# Altium PCB txrx.PcbDoc
Units mil, origin at the board's own origin, x right, y up, seen from the top; angles counter-clockwise.
Board outline 1966 x 1635 mil, 2 copper layers (Top Layer, Bottom Layer); 16 components, 24 nets, 74 pads, 16 vias.
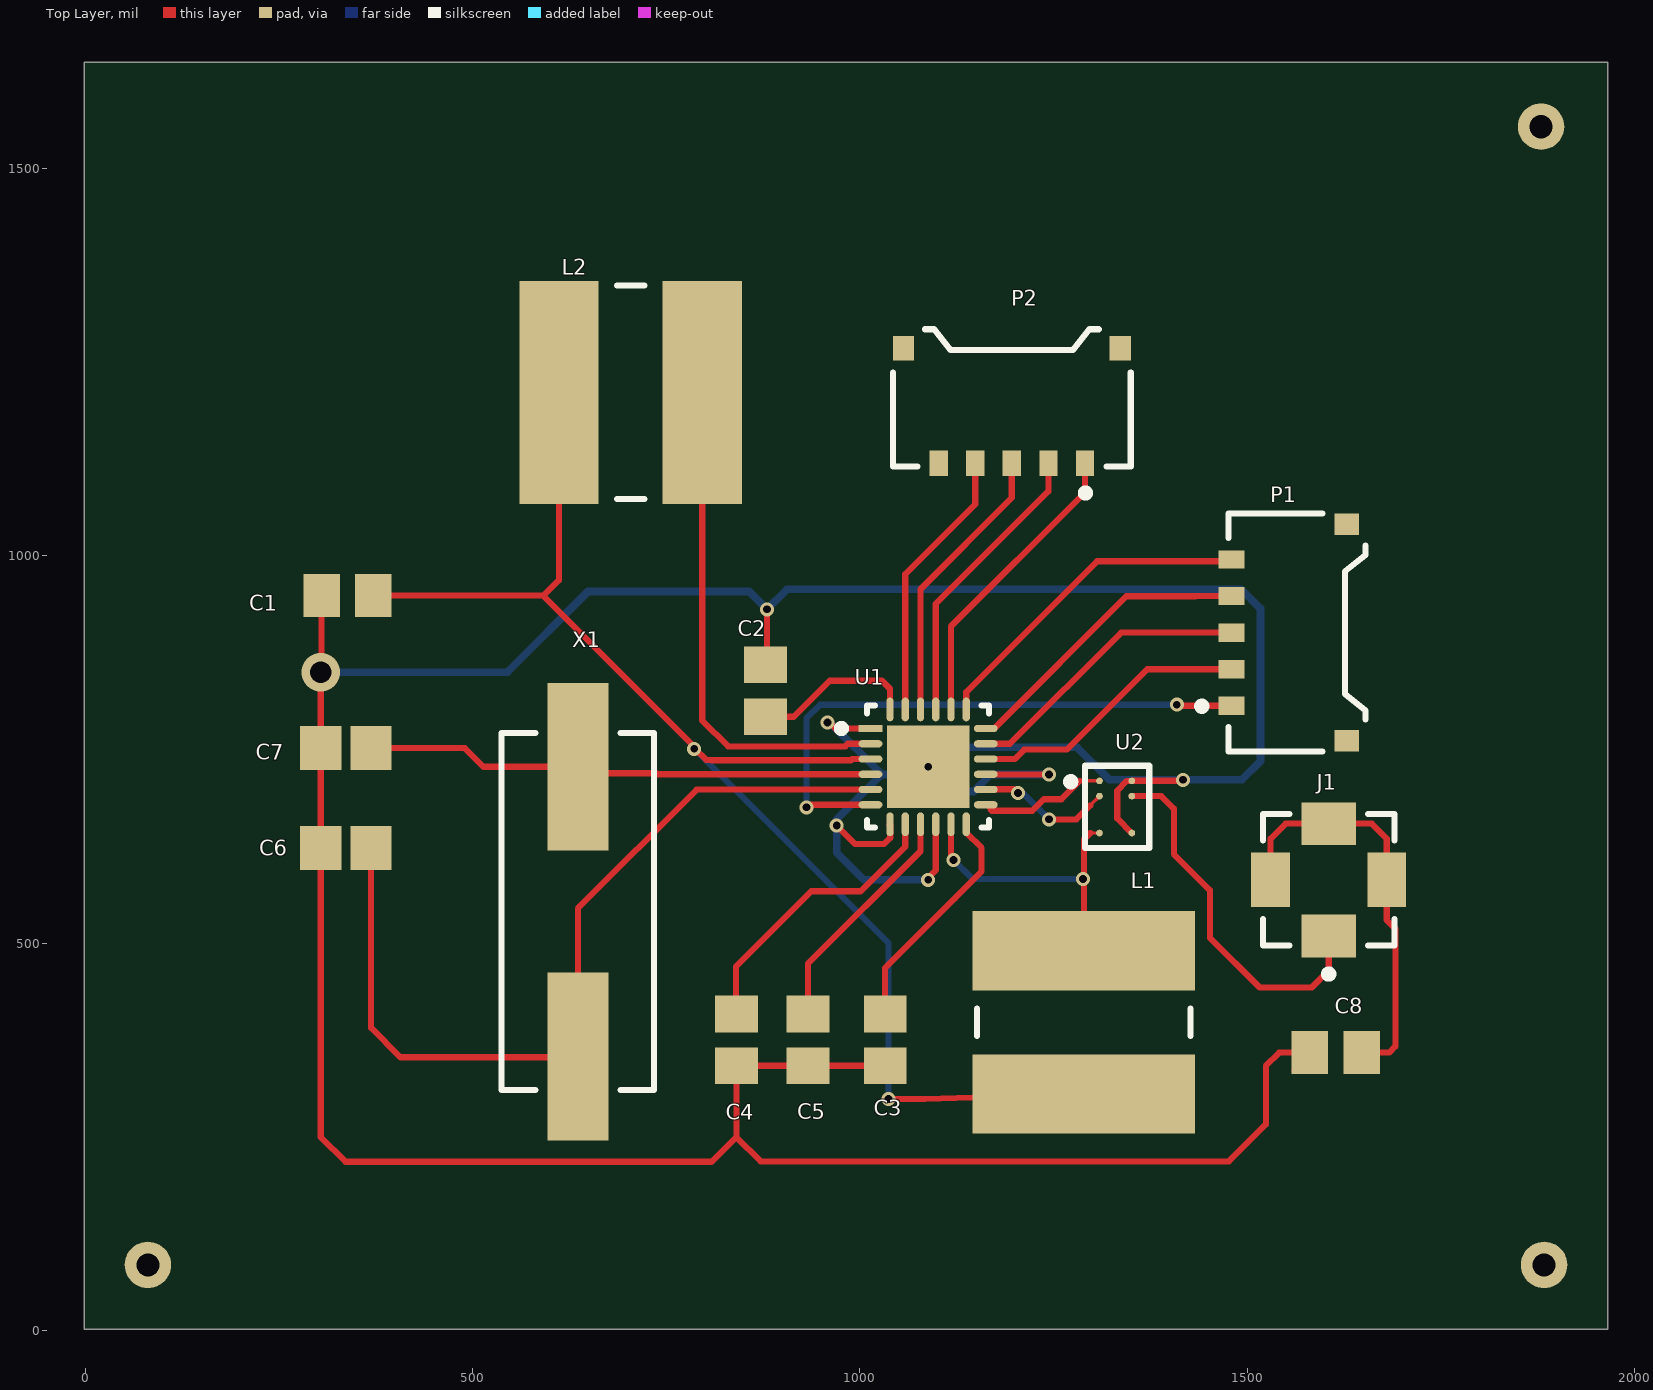
[diagram p0: Top Layer view]
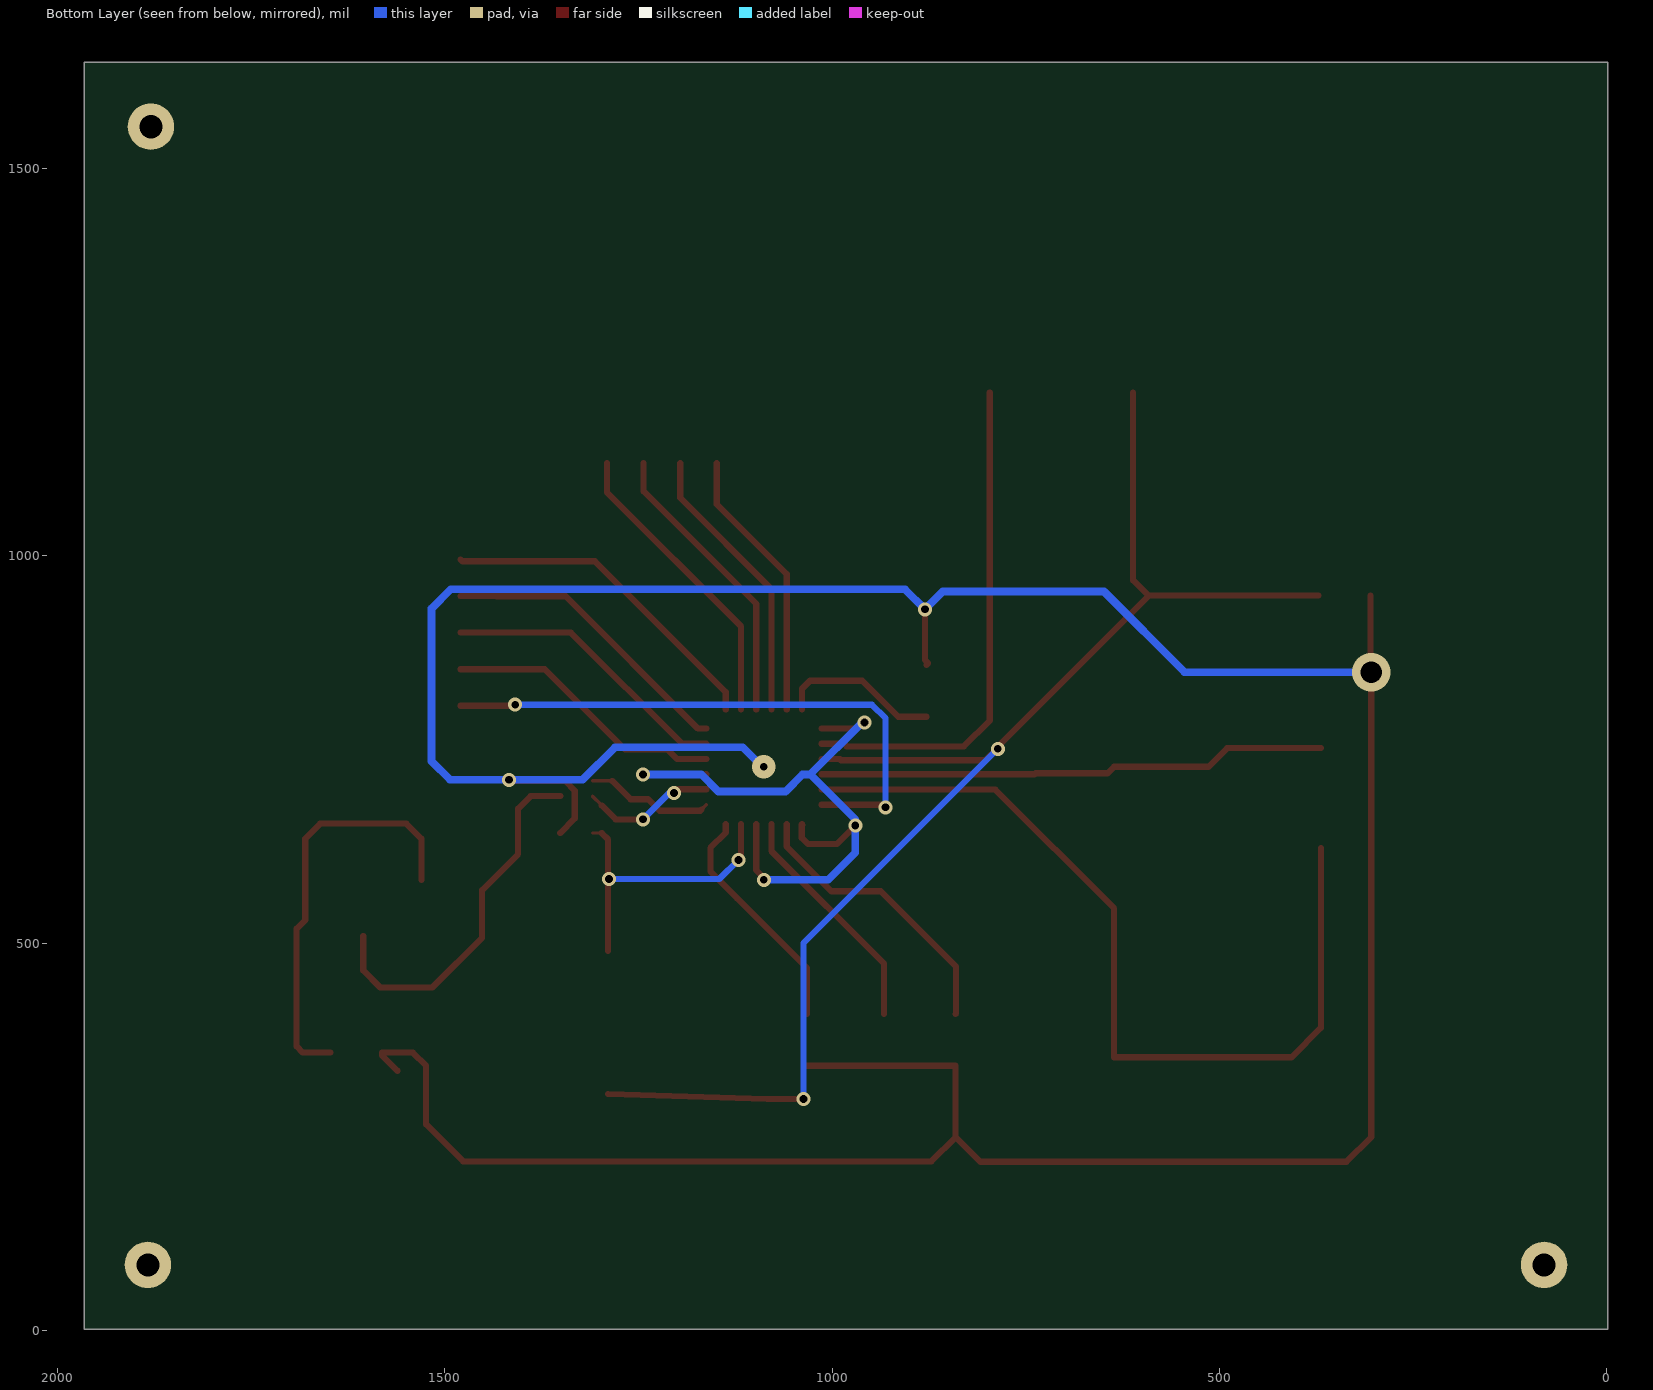
[diagram p1: Bottom Layer view, seen from below]

## Layer stack, top to bottom
Top Solder: solder mask 0.4, Solder Resist, Dk 3.5
Top Layer: signal copper 1.4
Dielectric 1: dielectric 12.6, FR-4, Dk 4.8
Bottom Layer: signal copper 1.4
Bottom Solder: solder mask 0.4, Solder Resist, Dk 3.5

## Board outline
-1,2 1965,2 1965,1637 -1,1637

## Design rules (kind name [scope] priority, off if disabled: settings)
Clearance [All] p1: gap=10 ignorepadtopadclearanceinfootprint=FALSE except(0: Arc-Hole Track-Hole SMDPad-Hole THPad-Hole Via-Hole Fill-Hole Poly-Hole Region-Hole Text-Hole)
PolygonConnect [All] p1: connectstyle=Relief reliefconductorwidth=10 reliefentries=4 polygonreliefangle="90 Angle" airgapwidth=10
RoutingVias [All] p1: holewidth=10 width=18 viastyle="Through Hole" minholewidth=10 minwidth=15 maxholewidth=12 maxwidth=20
SMDNeckDown [All] p1: percent=50.000
SolderMaskExpansion [All] p1: expansion=4 istentingtop=FALSE
Width [All] p1: maxlimit=10 minlimit=5 preferedwidth=8
30 further rules are at their usual default settings.

## Classes and differential pairs
component class txrx: C1 C2 C3 C4 C5 C6 C7 C8 J1 L1 L2 P2 U1 U2 X1

## Components (designator, comment, footprint, x,y, rotation, side; value= is the part's Value field where it differs from the comment)
C1 "0.033uF" CAPC2013X95X45NL10T25 338.63,949.02 r0 top
C2 "0.033uF" CAPC2013X95X45NL10T25 878,826 r270 top
C3 "0.033uF" CAPC2013X95X45NL10T25 1032.48,375.35 r90 top
C4 "0.033uF" CAPC2013X95X45NL10T25 840.55,375.35 r90 top
C5 "0.033uF" CAPC2013X95X45NL10T25 933.07,375.35 r270 top
C6 "20pF" CAPC2013X94X50NL20T25 336.66,623 r180 top
C7 "20pF" CAPC2013X94X50NL20T25 336.66,752 r180 top
C8 "0.033uF" CAPC2013X95X45NL10T25 1614,359 r0 top
J1 "908-22101" AMPH-908-22101_V 1605,582 r0 top
L1 "1mH" WE-TPC-6823-X 1289,398 r270 top
L2 "744062152" WE-TPC-6823-X 704,1211 r0 top
P1 "78171-0005" MOLX-78171-0005_V 1564,901 r90 top
P2 "78171-0005" MOLX-78171-0005_V 1196,1204 r180 top
U1 "S2-LPQTR" FP-QFN24L-IPC_C 1088,728 r0 top
U2 "BALF-SPI2-01D3" FP-Flip-Chip6-MFG 1332,676 r270 top
X1 "FOXSDLF/160-20" FOX-FOXSDLF160-20_V 636,541 r270 top

## Footprints (in the part's own frame and the unit in brackets; to place one, negate y for a bottom-side part, rotate by r counter-clockwise, add the part's x,y. Pads: shape width x height; smd on the part's side, far side on the other; paste and mask are expansions set on the pad)
AMPH-908-22101_V [mil] "Connector, 4-Leads, Body 4.318x4.318mm"
  rect 70x55 smd paste-39.37: 1(0,-72.5) 3(0,72.5)
  rect 50x70 smd paste-39.37: 2(75,0) 4(-75,0)
  silkscreen extent -85,-127 85,85, body extent -85,-85 85,85, height 143
CAPC2013X94X50NL20T25 [mm] "Chip Capacitor, 2-Leads, Body 2.01x1.25mm, IPC Medium Density"
  rect 1.35x1.45 smd: 1(-0.825,0) 2(0.825,0)
  body extent -1.1,-0.72 1.11,0.72, height 0.94
CAPC2013X95X45NL10T25 [mm] "Chip Capacitor, 2-Leads, Body 2.00x1.25mm, IPC Medium Density"
  rect 1.2x1.4 smd: 1(-0.85,0) 2(0.85,0)
  body extent -1.05,-0.67 1.05,0.67, height 0.95
FOX-FOXSDLF160-20_V [mm] "SMD, 2-Leads, Body 5x11.7mm, Height 4.5mm"
  rect 5.5x2 smd: 1(-4.75,0) 2(4.75,0)
  silkscreen extent -5.85,-2.5 5.85,2.5, body extent -5.85,-2.5 5.85,2.5, height 4.5
FP-Flip-Chip6-MFG [mm]
  round 0.22 smd paste-1000 mask-1000: A1(-0.855,-0.58) A2(-0.855,0.48) B1(-0.355,-0.58) B2(-0.355,0.48) D1(0.855,-0.58) D2(0.855,0.48)
  silkscreen extent -1.35,-1.65 1.35,1.05, body extent -1.58,-1.3 1.58,1.3, height 0.25
FP-QFN24L-IPC_C [mm]
  rect 0.779x0.239 smd paste+0 mask+0: 1(-1.89,1.25)
  rrect100% 0.779x0.239 smd paste+0 mask+0: 2(-1.89,0.75) 3(-1.89,0.25) 4(-1.89,-0.25) 5(-1.89,-0.75) 6(-1.89,-1.25) 13(1.89,-1.25) 14(1.89,-0.75) 15(1.89,-0.25) 16(1.89,0.25) 17(1.89,0.75) 18(1.89,1.25)
  rrect100% 0.239x0.779 smd paste+0 mask+0: 7(-1.25,-1.89) 8(-0.75,-1.89) 9(-0.25,-1.89) 10(0.25,-1.89) 11(0.75,-1.89) 12(1.25,-1.89) 19(1.25,1.875) 20(0.75,1.875) 21(0.25,1.875) 22(-0.25,1.875) 23(-0.75,1.875) 24(-1.25,1.875)
  rect 2.7x2.7 smd paste-1000 mask+0: 25(0,0)
  silkscreen extent -2.97,-2 2,2, body extent -2.38,-2.38 2.38,2.38, height 0.25
MOLX-78171-0005_V [mm] "Hand Drawn,5-Leads, Body 7.8x4.5mm,Pitch 1.2mm"
  rect 0.6x0.85 smd: 1(-2.4,2.145) 2(-1.2,2.145) 3(0,2.145) 4(1.2,2.145) 5(2.4,2.145)
  rect 0.7x0.8 smd: MP1(-3.55,-1.63) MP2(3.55,-1.63)
  silkscreen extent -3.9,-2.25 3.9,3.24, body extent -3.9,-2.25 3.9,2.28, height 1.41
WE-TPC-6823-X [mm] "SMD Inductor, 2-Leads, Body 6.8 x 6.8 mm"
  rect 2.6x7.3 smd: 1(-2.35,0) 2(2.35,0)
  silkscreen extent -0.45,-3.5 0.45,3.5, body extent -3.4,-3.4 3.4,3.4, height 2.29

## Part data
C1 C2 C3 C4 C5 C8: library part CMP-1036-04169-2, Manufacturer=Murata, Part Number=GRM219R71H333KA01D
C6 C7: library part CMP-2007-04294-1, Manufacturer="AVX Interconnect / Elco", Part Number=08055A200JAT2A
J1: library part CMP-2000-05707-1, "Female MMCX Connector, 1 Position, Height 3.607 mm, -40 to 90 degC, RoHS, Bulk", Dielectric Material=LiquidCrystalPolymer(LCP), Frequency - Max=6GHz, Housing Color=Black, Manufacturer=Amphenol, Operating Temperature=-55°C~155°C, Package Description="Female MMCX Connector, 1 Position, Height 3.607 mm", Standard Package=1, Voltage Rating=-, 3D Model=908-22101.igs, Body Finish=Gold, Body Material=BerylliumCopper, Cable Group=-, Category=Connectors,Interconnects, Center Contact Material=BerylliumCopper, Center Contact Plating=Gold, Connector Style=MMCX, Connector Type=Jack,FemaleSocket, Contact Termination=Solder, Datasheet URL=http://www.amphenolrf.com/downloads/dl/file/id/2664/product/2399/908_22101_customer_drawing.pdf, Datasheet Version="Rev. A, 05/1997", Family=CoaxialConnectors(RF), Fastening Type=Snap-On, Features=-, Impedance=50Ohm, Ingress Protection=-, Manufacturer URL=http://www.amphenol.com/, Mounting Technology=SurfaceMount, Mounting Type=SurfaceMount, Online Catalog=MMCX,MicroMate™Series, Other Names=90822101ARF1724, Package Reference=908-22101, Packaging=Bulk, Series=MicroMate™, Shield Termination=Solder
L1 L2: library part CMP-0227-00385-1, "SMD Shielded Tiny Power Inductor WE-TPC, L = 1500 µH", Inductance="1500 ÂµH", ComponentLink1Description="Manufacturer Link", ComponentLink1URL=http://www.we-online.com, ComponentLink2Description=Datasheet, ComponentLink2URL=http://www.we-online.de/katalog/media/pdf/744062152.pdf, DatasheetVersion="ver 5, Jan-2009", PackageDescription="SMD Inductor, 2-Leads, Body 6.8 x 6.8 mm", PackageReference=WE-TPC-6823-X, PackageVersion=2009
P1 P2: library part CMP-0538-00001-4, "Pico-EZmate 1.20 mm Pitch Wire-to-Board Header, Vertical, Housing Height:1.55 mm, with side-Friction Locks, 5 Circuits, 1.5 A, -25 to 85 degC, Tape and Reel", Color - Resin=Black, Current - Maximum per Contact="1.5 A", Manufacturer=Molex, Operating Temperature Range="-25 to 85 degC", Voltage - Maximum="50 V AC/DC", Circuits (Loaded)=5, Circuits (maximum)=5, ComponentLink1Description="Manufacturer URL", ComponentLink1URL=http://www.molex.com/, ComponentLink2Description=Datasheet, ComponentLink2URL=http://www.molex.com/webdocs/datasheets/pdf/en-us/0781710005_PCB_HEADERS.pdf, ComponentLink3Description="Package Specification", ComponentLink3URL=http://www.molex.com/pdm_docs/sd/781710005_sd.pdf, Material - Plating Mating=Gold, Material - Plating Termination=Gold, Mounting Technology="Surface Mount", Number of Rows=1, PackageDescription="5-Pin Surface Mount Device,  W-T-B plug connector, 7.8 x 4.5 mm", PackageReference=78171-0005, PackageVersion="Rev. D", Packing="Embossed Tape and Reel", PartNumber=78171-0005
U1: library part CMP-12160-000011-1, "IC RF TXRX ISM<1GHZ 24VFQFN", Ambient Temperature Range High=+105°C, Ambient Temperature Range Low=-40°C, Manufacturer=STMicroelectronics, Max Frequency=958MHz, Max Supply Voltage=3.6V, Min Supply Voltage=1.8V, Package=QFN24L, Temperature="-40°C to +105°C", Automotive=No, Bandwidth=1-800kHz, Category=IC, ComponentLink2Description=Datasheet, ComponentLink2URL=https://www.st.com/resource/en/datasheet/s2-lp.pdf, Data Rate=500kbits/s, Device Class L1="Integrated Circuits (ICs)", Device Class L2="RF Semiconductors and Devices", Device Class L3=Transceivers, Digikey Description="IC RF TXRX ISM<1GHZ 24VFQFN", Height=1mm, Interface=SPI,UART, Ipc Land Pattern Name=QFN50P400X400X90-24, Lead Free=Yes, Manufacturer Part Number=S2-LPQTR, Number Of Gpio=4, Octopart=https://octopart.com/s2-lpqtr-stmicroelectronics-76714564, RoHS=TRUE, Sensitivity=-130dBm, Standoff Height=0.02mm, Temperature Range High=+105°C, Temperature Range Low=-40°C
U2: library part CMP-12156-000001-1, "BALUN 868MHZ-928MHZ 50/50 6UFBGA", Manufacturer=STMicroelectronics, Max Frequency=930MHz, Package=Flip-Chip6, Temperature="-40°C to +105°C", Temperature Range High=+105°C, Temperature Range Low=-40°C, Automotive=No, Bandwidth=860-930MHz, Category=IC, ComponentLink2Description=Datasheet, ComponentLink2URL=https://www.st.com/resource/en/datasheet/balf-spi2-01d3.pdf, Device Class L1="Integrated Circuits (ICs)", Device Class L2="RF Semiconductors and Devices", Device Class L3=unset, Digikey Description="BALUN 868MHZ-928MHZ 50/50 6UFBGA", Height=0.68mm, Lead Free=Yes, Manufacturer Part Number=BALF-SPI2-01D3, Mouser Description="BALF-SPI2 Series 927 MHz 21 dB 50 Ohm SMT Balun Transformer - FLIP CHIP-6", Octopart=https://octopart.com/balf-spi2-01d3-stmicroelectronics-84422982, RoHS=TRUE, Standoff Height=0.18mm
X1: library part CMP-1749-00001-1, "Resistance Weld SMD Crystal, 16 MHz, +/- 30 ppm, 20 pF, -20 to 70 degC, 2-Pin SMD, RoHS, Tape and Reel", Case\Package=SOT-553-6, Max Operating Temperature="150 degC", Max Supply Voltage="3.3 V", Max Supply Voltage (DC)="6 V", Min Operating Temperature="-55 degC", Min Supply Voltage="1.4 V", Min Supply Voltage (DC)="4 V", Output Current="3 mA", Package Quantity=1, ComponentLink1Description="Manufacturer URL", ComponentLink1URL=http://www.foxonline.com/, ComponentLink2Description=Datasheet, ComponentLink2URL=http://foxonline.com/pdfs/hc49sdlf.pdf, DatasheetVersion=Mar-15, Height="0.55 mm", Interface=I2C, Length="1.6 mm", Mount="Surface Mount", PackageDescription="2-Pin Surface Mount Device, Body 5 x 11.7 mm, Height 4.5 mm", PackageReference=FOX-FOXSDLF160-20, Packaging="Cut Tape", Pins=6, Radiation Hardening=No, REACH SVHC="No SVHC", RoHSCompliant=true, Weight="9.9E-05 oz", Width="1.2 mm"

## Free pads (board coordinates)
  round 60 hole 30: 5(1879,1554) 6(1883,85) 7(81,85)

## Via types
v1: diameter 18, hole 10, Top Layer to Bottom Layer, 14 vias
v2: diameter 30, hole 10, Top Layer to Bottom Layer, 1 vias
v3: diameter 50, hole 28, Top Layer to Bottom Layer, 1 vias

## Nets (pads, with @x,y where several pads share a name; then routed paths per layer and width w, separated by ;. In a path a pad name is that pad's centre, name@x,y a point inside that pad or via, vN(x,y) a via of type N, cw(c..) or ccw(c..) an arc to the next point about the centre after c; other vN are vias at no path point)
GND: C1.1 C2.1 C3.1 C4.1 C5.2 C6.2 C7.2 C8.1 U1.25 U2.A2 U2.D2 | length 4610.7
  Top Layer w8: C1.1 305.17,850.98 v3(304.18,850) C7.2 C6.2 304.18,250 336.18,218 808.55,218 840.55,250 ; C2.1 876,861.47 880,865.47 v1(880,931) ; C3.1 C5.2 C4.1 840.55,250 ; U2.D2 1332,661.24 1332,697 1344.53,709.53 1350.77,709.53 U2.A2 1351.02,709.79 1415.79,709.79 v1(1417,711) ; C8.1@1560.91,335.44 1580.54,355.06 C8.1 1541,359 1524,342 1524,266.55 1476,218.55 872,218.55 840.55,250
  Bottom Layer w10: v3(304.18,850) 545,850 649,954 857,954 v1(880,931) 906,957 1492,957 1517,932 1517,735 1493,711 v1(1417,711) 1322,711 1280,753 1115.33,753 1090.33,728 v2(1088,728)
NetC1_2: C1.2 L1.2 L2.1 U1.3 | length 1810.8
  Top Layer w8: C1.2 592.02,949.02 ; L2.1 611.48,968.48 592.02,949.02 ; U1.3 990.1,737.84 988.46,736.2 808.82,736.2 808.35,736.67 801.37,736.67 787.04,751 v1(786,751) 786,754 592.02,947.98 592.02,949.02 ; v1(1037,299) 1083.52,299 L1.2
  Bottom Layer w8: v1(786,751) 1037,500 v1(1037,299)
NetC2_2: C2.2 U1.24 | length 211.2
  Top Layer w8: C2.2 914.53,792.53 961,839 1028.47,839 1038.79,828.68 U1.24
NetC3_2: C3.2 U1.12 | length 304.6
  Top Layer w8: C3.2 1032.48,468.27 1122.49,558.28 1157,592.79 1157,623.19 1137.21,642.98 U1.12
NetC4_2: C4.2 U1.8 | length 372.8
  Top Layer w8: C4.2 840,409.37 840,470 937.19,567.19 1000.81,567.19 1058.47,624.86 U1.8
NetC5_1: C5.1 U1.9 | length 304.9
  Top Layer w8: C5.1 933.07,474 1078.16,619.09 U1.9
NetC6_1: C6.1 U1.5 X1.2 | length 1147.9
  Top Layer w8: C6.1 369.14,390.86 407,353 636,353 X1.2 636,545 789.47,698.47 U1.5
NetC7_1: C7.1 U1.4 X1.1 | length 658.5
  Top Layer w8: C7.1 490,752 513.99,728.01 X1.1 644.45,719.56 737.18,719.56 738.58,718.16 U1.4
NetC8_2: C8.2 J1.2 J1.3 J1.4 | length 538.6
  Top Layer w8: J1.4 1530,635 1549.5,654.5 J1.3 1660.5,654.5 1680,635 J1.2 1680,530 1691,519 1691,367 1683,359 C8.2
NetJ1_1: J1.1 U2.B2 | length 480.3
  Top Layer w8: U2.B2 1389.02,689.98 1405.25,673.75 1405.25,615.25 1451.75,568.75 1451.75,507.25 1516,443 1583,443 1605,465 J1.1
NetL1_1: L1.1 U1.11 U2.D1 | length 396.6
  Top Layer w4.33: 1297.34,642.34 U2.D1
  Top Layer w4.71: U1.11 U1.11@1118.43,652.7 ; v1@1118.43,609.88 v1(1120.84,607.47)
  Top Layer w8: U1.11 1117.53,613.49 1120.84,610.18 v1(1120.84,607.47) ; L1.1 1289,634 1297.34,642.34
  Bottom Layer w8: v1(1120.84,607.47) 1145.31,583 v1(1288,583)
NetL2_2: L2.2 U1.2 | length 655.8
  Top Layer w8: L2.2 796.52,787.48 829.8,754.2 981,754.2 984.33,757.53 U1.2
NetP1_1: P1.1 U1.6 | length 755.4
  Top Layer w8: v1(931,675.47) 933.71,675.47 937.02,678.79 U1.6 ; v1(1409,808) 1410.49,806.51 P1.1
  Bottom Layer w8: v1(931,675.47) 931,790.53 948.47,808 v1(1409,808)
NetP1_2: P1.2 U1.16 | length 365.2
  Top Layer w8: U1.16 1199.84,737.84 1212,750 1267,750 1370.76,853.76 P1.2
NetP1_3: P1.3 U1.17 | length 376.6
  Top Layer w8: U1.17 1193.53,757.53 1337,901 P1.3
NetP1_4: P1.4 U1.18 | length 388
  Top Layer w8: U1.18 1173,777.21 1343.79,948 1433,948 1433.12,948.12 1479.43,948.12 P1.4
NetP1_5: P1.5 U1.19 | length 435.7
  Top Layer w8: U1.19 1137.21,824.21 1306,993 1477.06,993 P1.5
NetP2_1: P2.1 U1.20 | length 389.4
  Top Layer w8: U1.20 1117.53,909.04 1290.49,1082 P2.1
NetP2_2: P2.2 U1.21 | length 378
  Top Layer w8: U1.21 1097.84,938 1243.24,1083.4 P2.2
NetP2_3: P2.3 U1.22 | length 366.5
  Top Layer w8: U1.22 1078.16,957.16 1196,1075 P2.3
NetP2_4: P2.4 U1.23 | length 355.1
  Top Layer w8: U1.23 1058.47,976.47 1148.76,1066.76 P2.4
NetU1_13: U1.13 U2.A1 | length 166
  Top Layer w4.33: 1283.66,709.66 U2.A1
  Top Layer w4.71: U1.13 1168.54,672.64
  Top Layer w8: 1168.54,672.64 1170.18,671 1222.47,671 1237.47,686 1260,686 1283.66,709.66
NetU1_14: U1.14 U2.B1 | length 175.4
  Top Layer w4.33: 1297.19,678 U2.B1
  Top Layer w8: U1.14 1162.66,698.74 1199.31,698.74 v1(1204,694) ; v1(1244,660) 1279.19,660 1297.19,678
  Bottom Layer w8: v1(1204,694) 1210,694 v1(1244,660)
VCC: U1.1 U1.7 U1.10 U1.15 | length 893.9
  Top Layer w8: v1(958,785) 960.71,785 968.49,777.21 U1.1 ; v1@970.8,652.8 v1(970,652) 994,628 1031,628 1039,636 1039,653.39 U1.7 1038.79,653.46 U1.7@1038.13,652.8 ; v1(1088,582) 1088,584.71 1097.84,594.55 U1.10 ; U1.15 1162.67,717.89 1236.89,717.89 v1@1237,718
  Bottom Layer w10: v1(958,785) 961,785 1028,718 ; v1(1088,582) 1005,582 970,617 v1(970,652) 970,660 1028,718 ; v1@1237,718 1168.92,718 1146.92,696 1060,696 1038,718 1028,718
  other v1: 1244,718
pads on no net: P1.MP1 P1.MP2 P2.5 P2.MP1 P2.MP2

## Silkscreen, mask and mechanical layers (free items; w line width, h text height)
Mechanical 13:
  lines w10: -1,2 -1,1637 1965,1637 1965,1132 1965,1109 1965,3 1963,1 0,1 -1,2
  text "S2-LP Transceiver" at 562,77 h60